# EAGLE board Plug_pic28pin (EAGLE 5.10)
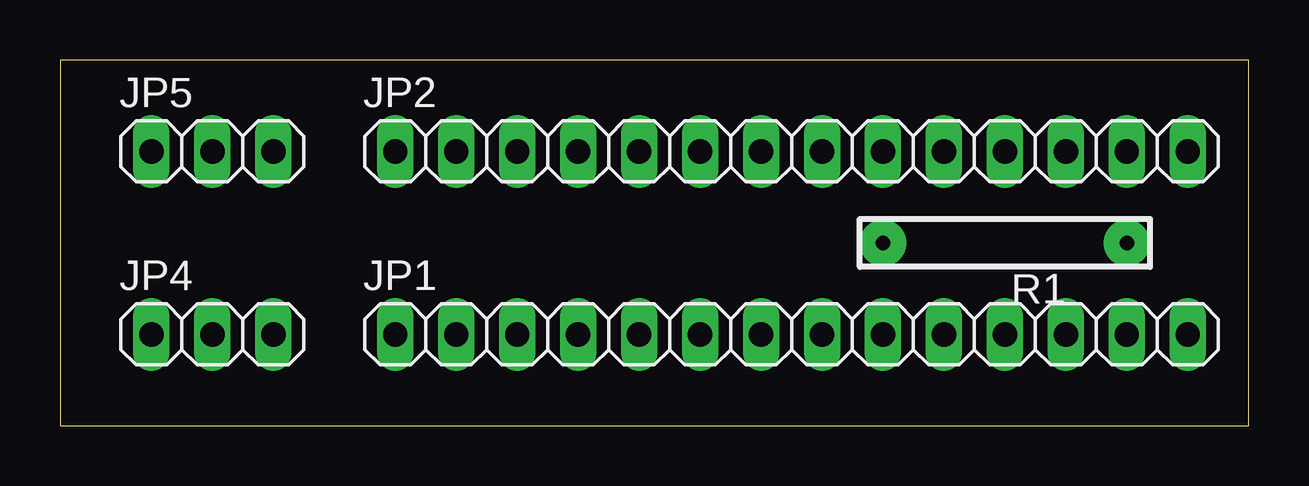
[diagram p0: board, top side]
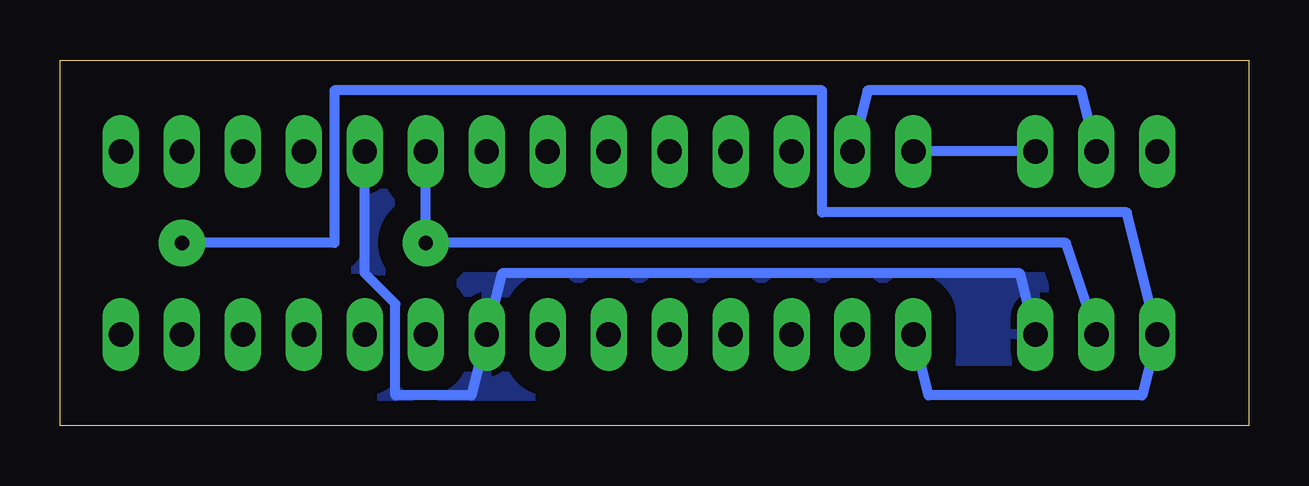
[diagram p1: board, bottom side, seen from below]

Size 49.53 x 15.24 mm. Coordinates in mm from the lower left corner, seen from the top.
Outline: 0,0 49.53,0 49.53,15.24 0,15.24 0,0
Copper layers (1*16): Top 0.035mm / dielectric 1.5mm / Bottom 0.035mm
Design rules "default": minimum track width 10mil, minimum drill 24mil, track to track 8mil, track to pad 8mil, pad to pad 8mil, via to via 8mil, smd to smd 8mil, copper to edge 40mil, drill to drill 8mil, minimum pad ring 10mil, minimum via ring 8mil, stop-mask expansion 4mil, vias tented up to drill 0mil, thermal gap 10mil

## Footprints (pad centres in the part's own frame; a part is rotated, then mirrored left to right if it is on the bottom)
1X14 = drill 1.016 long: 1 -16.51,0; 2 -13.97,0; 3 -11.43,0; 4 -8.89,0; 5 -6.35,0; 6 -3.81,0; 7 -1.27,0; 8 1.27,0; 9 3.81,0; 10 6.35,0; 11 8.89,0; 12 11.43,0; 13 13.97,0; 14 16.51,0
1X03 = drill 1.016 long: 1 -2.54,0; 2 0,0; 3 2.54,0
R_0.125W_4 = drill 0.6 pad 1.93 round: 1 -5.08,0; 2 5.08,0

## Placement (x,y rotation side)
JP1  [1X14]  30.48,3.81 0 top
JP2  [1X14]  30.48,11.43 0 top
JP4  [1X03]  6.35,3.81 0 top
JP5  [1X03]  6.35,11.43 0 top
R1  10K  [R_0.125W_4]  39.37,7.62 180 top

## Library data of the parts
JP1 JP2 JP4 JP5 = pinheader
R1 = MyLib

## Nets
GND: JP1.8 JP2.10 JP4.3
N$1: JP1.1 JP4.1 R1.1
N$2: JP2.1 JP5.3
N$3: JP2.2 JP5.2
VCC: JP2.9 JP4.2 R1.2

## Tracks (layer width: path | path; a pad name or v marks a point on that pad's centre or on a via)
GND
  Bottom 0.406: JP4.3 9.53,6.35 31.11,6.35 JP1.8 32.38,1.27 35.56,1.27 35.56,5.08 36.83,6.35 JP2.10
  pour Bottom (isolate 1.016): 0,15.24 0,0 49.53,0 49.53,15.24
N$1
  Bottom 0.406: JP1.1 13.34,1.27 4.45,1.27 JP4.1 5.08,8.89 17.78,8.89 17.78,13.97 38.1,13.97 38.1,7.62 R1.1
N$2
  Bottom 0.406: JP5.3 JP2.1
N$3
  Bottom 0.406: JP5.2 6.99,13.97 15.88,13.97 JP2.2
VCC
  Bottom 0.406: JP4.2 7.62,7.62 R1.2 JP2.9